# EAGLE board sp6641b (EAGLE 7.7.0)
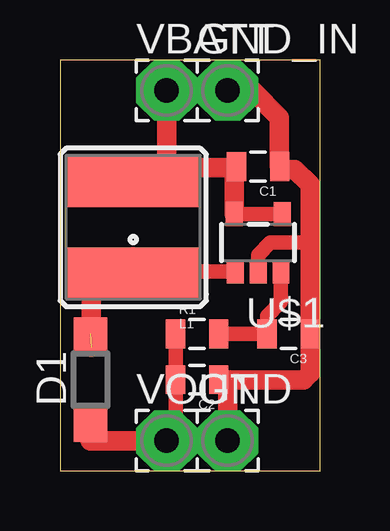
[diagram p0: board, top side]

Size 10.85 x 17.14 mm. Coordinates in mm from the lower left corner, seen from the top.
Outline: 0,0 10.85,0 10.85,17.14 0,17.14 0,0
Copper layers (1*16): Top 0.035mm / dielectric 1.5mm / Bottom 0.035mm
Design rules "default": minimum track width 16mil, minimum drill 16mil, track to track 8mil, track to pad 8mil, pad to pad 8mil, via to via 8mil, smd to smd 8mil, copper to edge 4mil, drill to drill 16mil, minimum pad ring 10mil, minimum via ring 8mil, stop-mask expansion 4mil, vias tented up to drill 0mil, thermal gap 10mil

## Footprints (pad centres in the part's own frame; a part is rotated, then mirrored left to right if it is on the bottom)
0805 = smd 0.8 x 1.2: 1 -0.9,0; 2 0.9,0
SOD123 = smd 1.4 x 1.4: A 1.9,0; C -1.9,0
2,54/1,0 = drill 1.016 pad 2.54 octagon: 1 0,0
CR54 = smd 5.5 x 2.15: P$1 0,1.92; P$2 0,-1.92
SOT23-5 = smd 0.7 x 1: 1 0.95,1.2; 2 0,1.2; 3 -0.95,1.2; 4 -1,-1.2; 5 1,-1.2

## Placement (x,y rotation side)
C1  100uF  [0805]  8.26,12.7 180 top
C2  100uF  [0805]  5.71,3.81 180 top
C3  1uF  [0805]  9.53,5.71 180 top
D1  MBR0520  [SOD123]  1.27,3.81 90 top
GND  [2,54/1,0]  6.99,1.27 0 top
GND_IN  [2,54/1,0]  6.99,15.88 0 top
L1  22uH  [CR54]  3.05,10.16 180 top
R1  10  [0805]  5.71,5.71 0 top
U$1  SP6641A  [SOT23-5]  8.26,9.53 180 top
VBATT  [2,54/1,0]  4.45,15.88 0 top
VOUT  [2,54/1,0]  4.45,1.27 0 top

## Library data of the parts
C1-C3 L1 = SparkFun
D1 = diode
GND GND_IN VBATT VOUT = wirepad
R1 = SparkFun-Resistors; PROD_ID: RES-11622
U$1 = Sipex Custom

## Nets
GND: C1.1 C2.1 C3.1 GND.1 GND_IN.1 U$1.2
N$1: C3.2 R1.2 U$1.3
N$3: D1.A L1.P$1 U$1.1
VBATT: C1.2 L1.P$2 U$1.4 U$1.5 VBATT.1
VOUT: C2.2 D1.C R1.1 VOUT.1

## Tracks (layer width: path | path; a pad name or v marks a point on that pad's centre or on a via)
GND
  Top 0.61: 9.14,3.8 C2.1 | U$1.2 8.26,9.02 8.76,9.53 10.43,9.53
  Top 0.813: GND_IN.1 8,15.88 9.14,14.73 9.14,12.71 C1.1 9.28,12.57 9.78,12.57 10.43,11.95 10.43,9.53 C3.1 10.43,4.08 10.16,3.81 C2.1 6.99,3.44 GND.1
N$1
  Top 0.61: R1.2 C3.2 8.64,5.73 8.64,6.48 9.21,7.05 U$1.3
N$3  (1 unrouted)
  Top 0.406: 1.85,7.52 L1.P$1 1.29,8.48
  Top 0.61: U$1.1 4.51,8.32 4.45,8.26 3.06,8.26 L1.P$1
  Top 0.813: 1.29,8.48 1.29,5.16
VBATT
  Top 0.406: 6.99,12.65 C1.2 | 4.45,12.95 C1.2 | 2.11,12.65 L1.P$2 | 7.32,12.65 C1.2
  Top 0.61: U$1.4 U$1.5
  Top 0.813: VBATT.1 4.45,12.95 | 7.32,12.65 2.11,12.65 | U$1.5 7.25,12.6 C1.2
VOUT
  Top 0.61: R1.1 C2.2 4.83,3.8 4.83,2.41 4.45,2.03 VOUT.1
  Top 0.813: D1.C 1.27,1.27 VOUT.1